# Altium PCB PCB.PcbDoc
Units mm, origin at the board's own origin, x right, y up, seen from the top; angles counter-clockwise.
Board outline 94 x 94 mm, 2 copper layers (Top Layer, Bottom Layer); 27 components, 14 nets, 75 pads, 30 vias.
Unrouted connection lines stored in the file: 38.
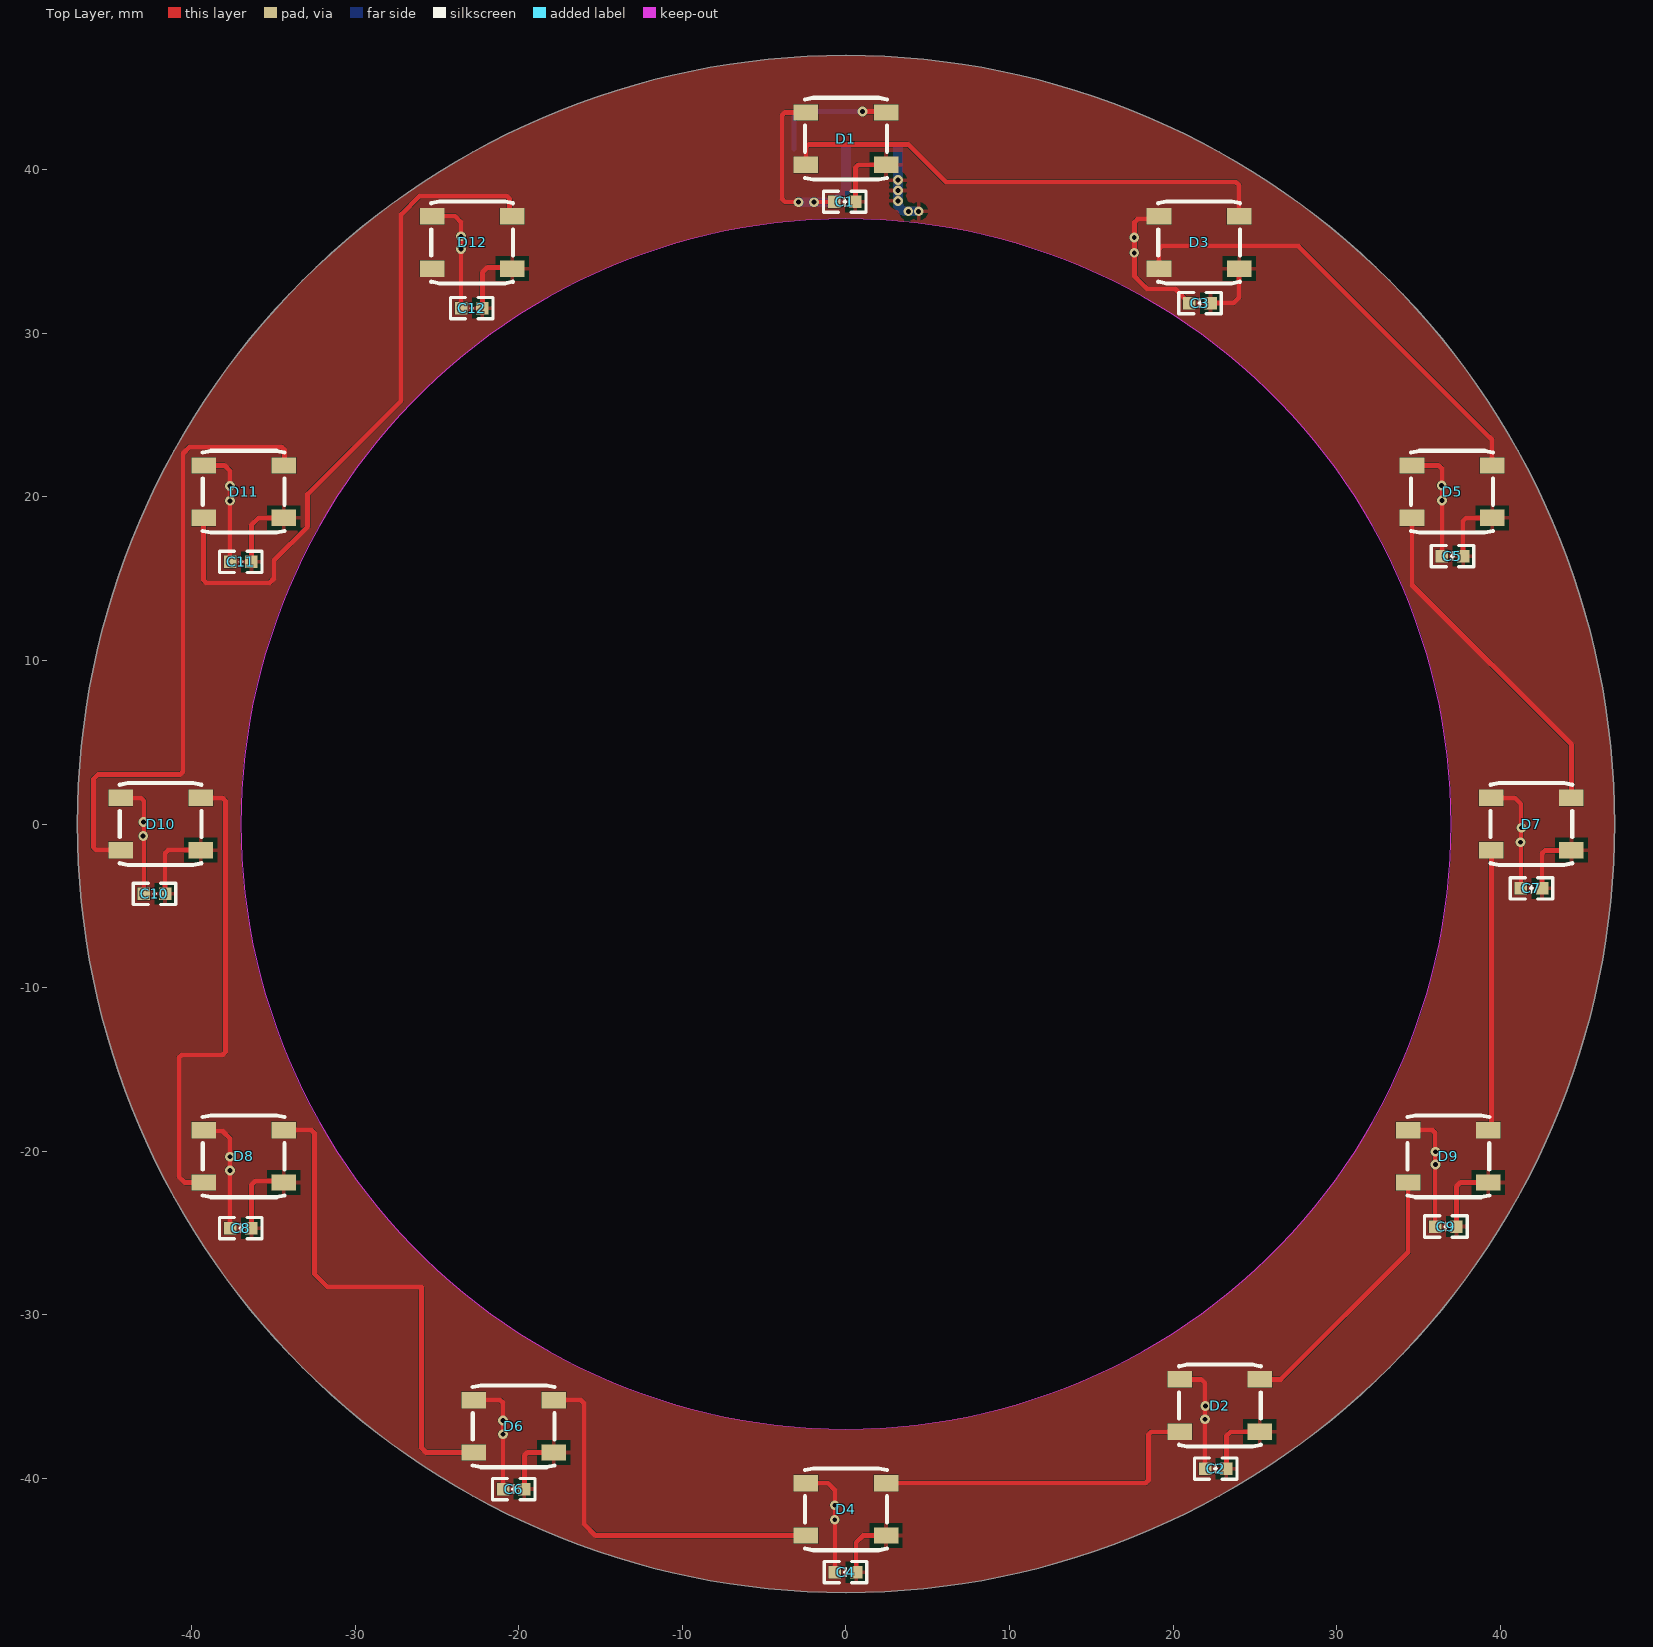
[diagram p0: Top Layer view]
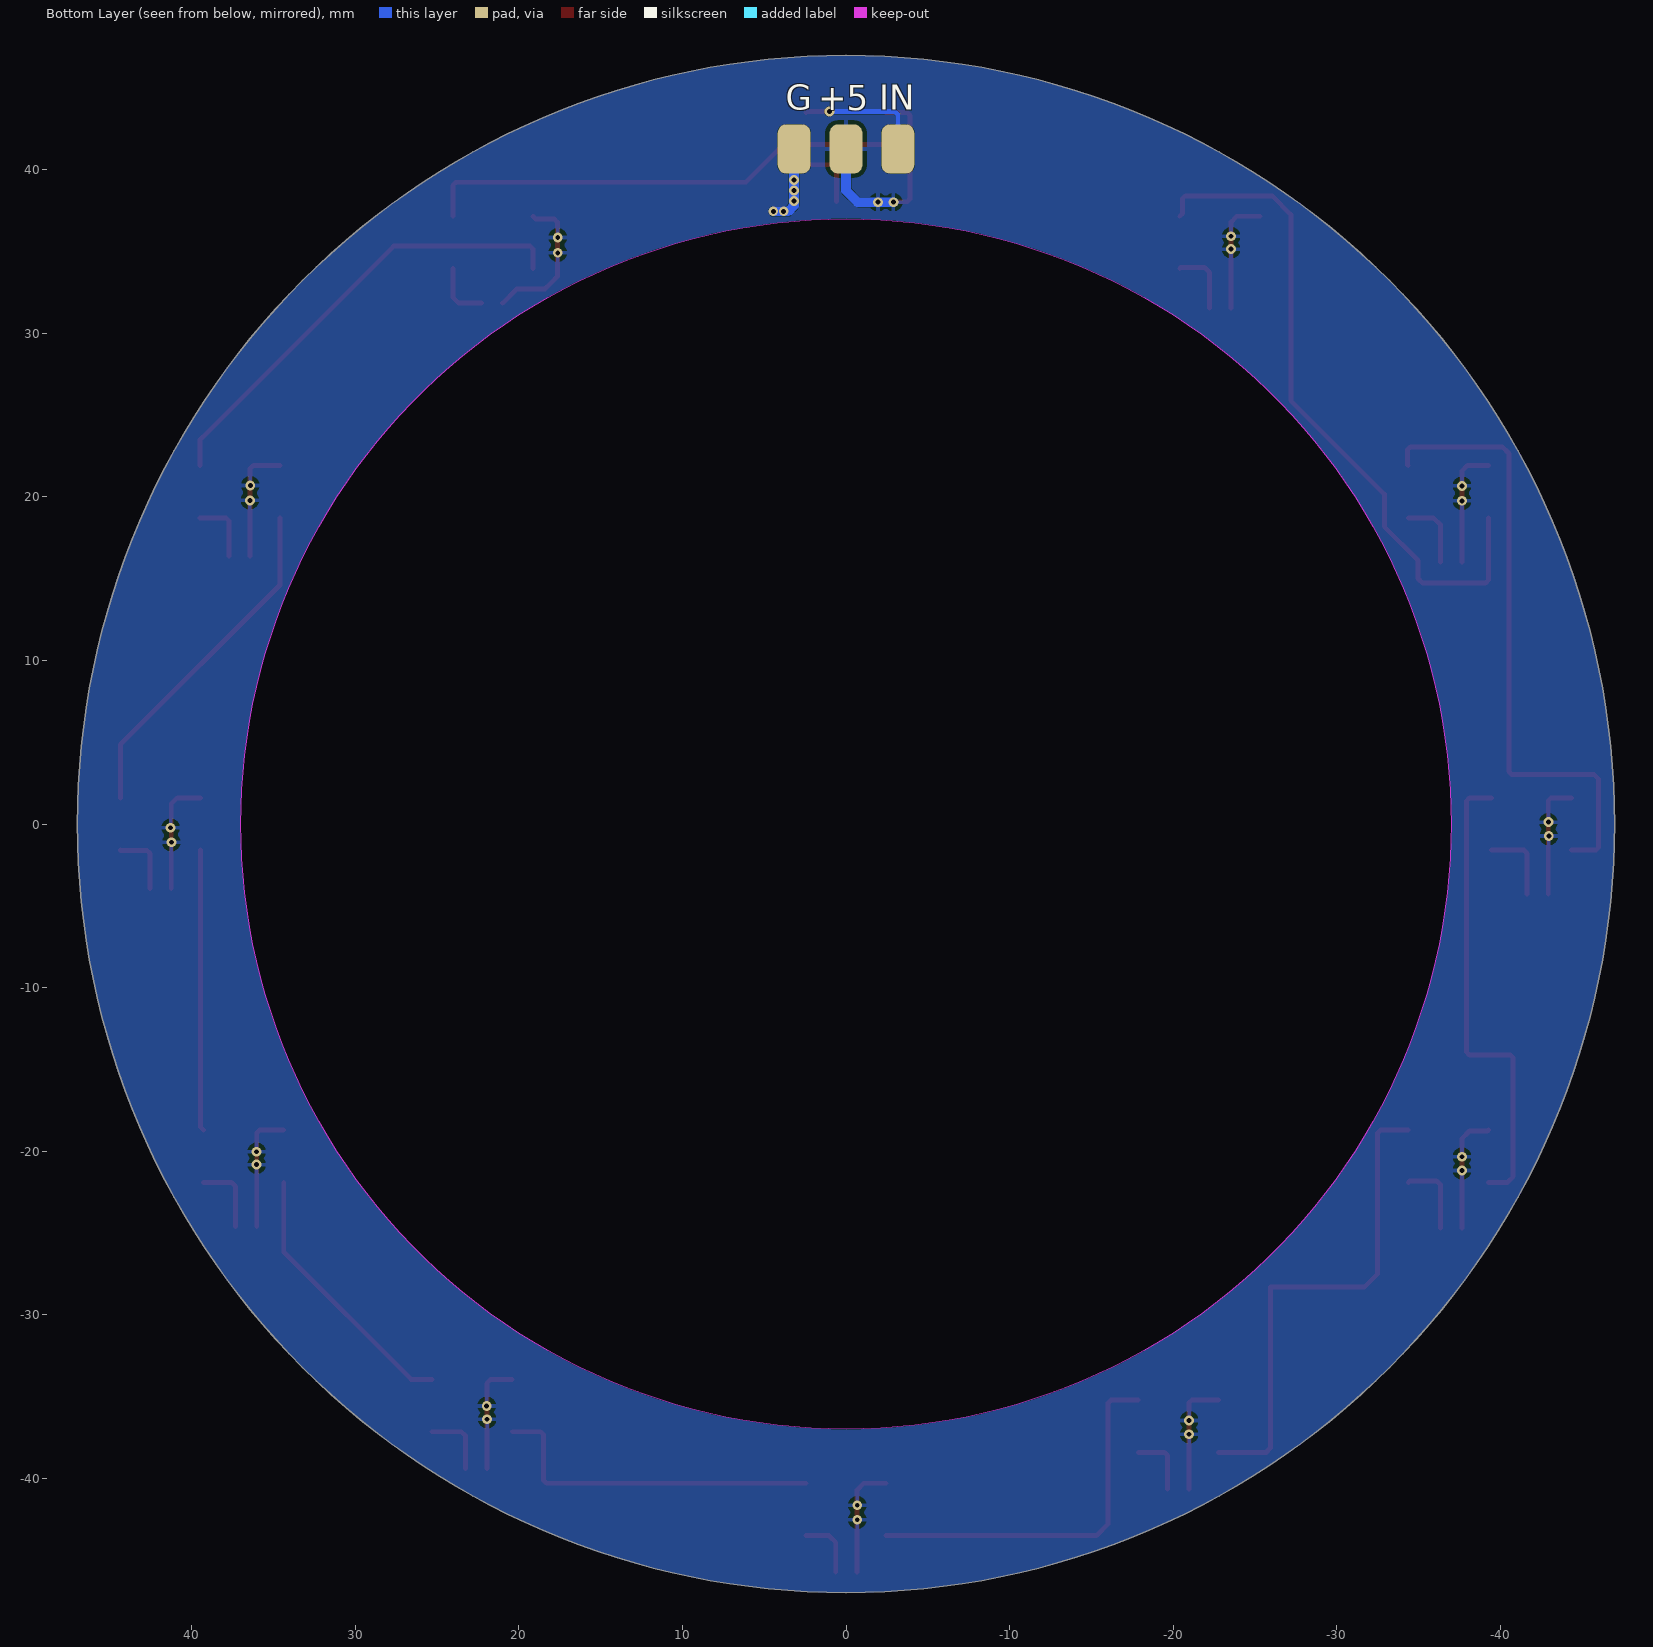
[diagram p1: Bottom Layer view, seen from below]
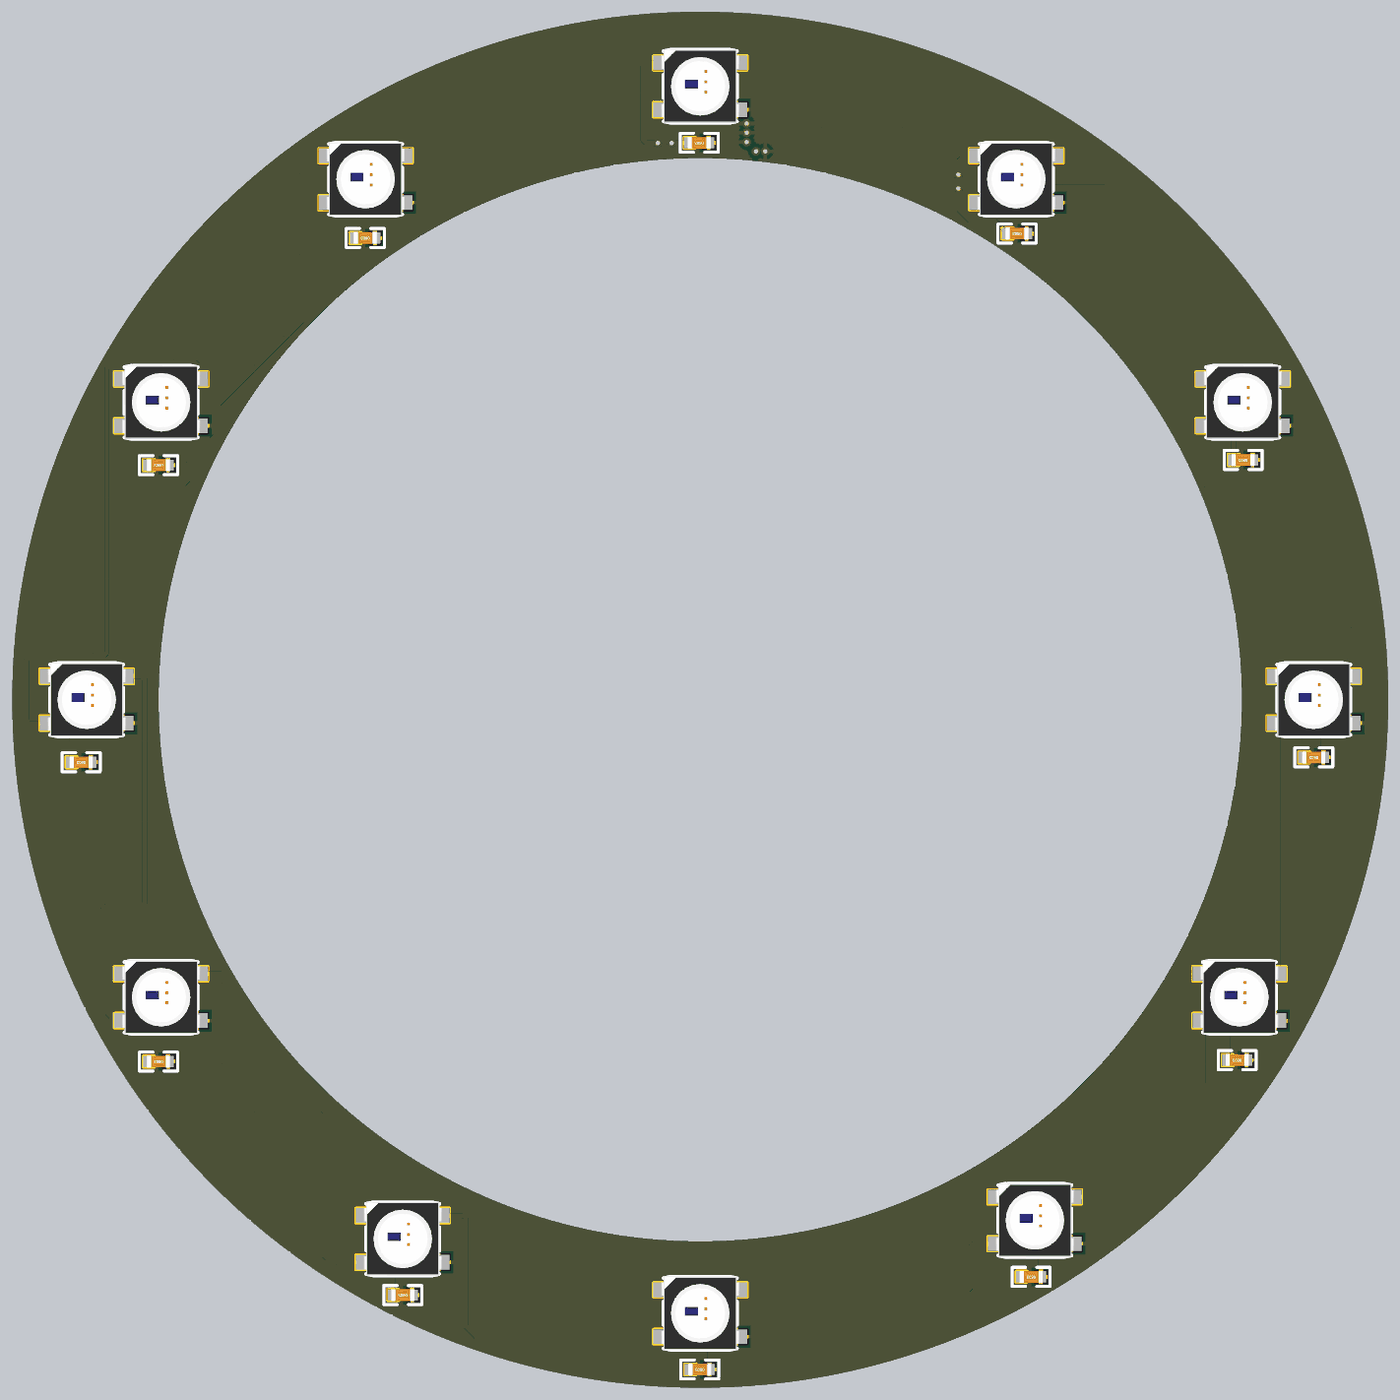
[diagram p2: 3D render of the assembled board from above, using the file's embedded part models]

## Layer stack, top to bottom
Top Solder: solder mask 0.0102, Solder Resist, Dk 3.5
Top Layer: signal copper 0.0356
Dielectric 1: dielectric 0.32, FR-4, Dk 4.8
Bottom Layer: signal copper 0.0356
Bottom Solder: solder mask 0.0102, Solder Resist, Dk 3.5

## Board outline
-47,0 ccw(c0,0) 0,-47 ccw(c0,0) 47,0 ccw(c0,0) 0,47 ccw(c0,0)
cut-out: -37,0 ccw(c0,0) 0,-37 ccw(c0,0) 37,0 ccw(c0,0) 0,37 ccw(c0,0)

## Design rules (kind name [scope] priority, off if disabled: settings)
Clearance [All] p1: gap=0.005 ignorepadtopadclearanceinfootprint=FALSE
HoleToHoleClearance [All] p1 off: gap=0.254 allowstackedmicrovias=TRUE
LayerPairs [All] p1 off: enforce=TRUE
MinimumSolderMaskSliver [All] p1 off: minsoldermaskwidth=0.254
NetAntennae [All] p1 off: netantennaetolerance=0
PolygonConnect [All] p1: connectstyle=Relief reliefconductorwidth=0.254 reliefentries=4 polygonreliefangle="90 Angle" airgapwidth=0.254
RoutingVias [All] p1: holewidth=0.711 width=1.27 viastyle="Through Hole" minholewidth=0.3 minwidth=0.6 maxholewidth=0.711 maxwidth=1.27
SilkToSilkClearance [All] p1 off: silktosilkclearance=0.254
SilkToSolderMaskClearance [IsPad] p1 off: minsilkscreentomaskgap=0.254 clearancetoexposedcopper=TRUE
SolderMaskExpansion [All] p1: expansion=0.102 istentingtop=FALSE
Width [All] p1: maxlimit=1 minlimit=0.3 preferedwidth=0.6 minimp=50.000000 maximp=50.000000 favimp=50.000000
24 further rules are at their usual default settings.

## Components (designator, comment, footprint, x,y, rotation, side; value= is the part's Value field where it differs from the comment)
+5 "PAD" PAD 0,41.275 r180 bottom (schematic designator P1)
C1 "cap" 0603c -0.076,38.049 r180 top
C2 "cap" 0603c 22.606,-39.421 r180 top
C3 "cap" 0603c 21.641,31.852 r180 top
C4 "cap" 0603c -0.025,-45.745 r180 top
C5 "cap" 0603c 37.084,16.383 r180 top
C6 "cap" 0603c -20.32,-40.665 r180 top
C7 "cap" 0603c 41.91,-3.937 r180 top
C8 "cap" 0603c -37.008,-24.714 r180 top
C9 "cap" 0603c 36.678,-24.613 r180 top
C10 "cap" 0603c -42.291,-4.267 r180 top
C11 "cap" 0603c -37.008,16.027 r180 top
C12 "cap" 0603c -22.885,31.547 r180 top
D1 "WS2812" WS2812 0,41.91 r0 top
D2 "WS2812" WS2812 22.86,-35.56 r0 top
D3 "WS2812" WS2812 21.59,35.56 r0 top
D4 "WS2812" WS2812 0,-41.91 r0 top
D5 "WS2812" WS2812 37.059,20.32 r0 top
D6 "WS2812" WS2812 -20.32,-36.83 r0 top
D7 "WS2812" WS2812 41.91,0 r0 top
D8 "WS2812" WS2812 -36.83,-20.32 r0 top
D9 "WS2812" WS2812 36.83,-20.32 r0 top
D10 "WS2812" WS2812 -41.91,0 r0 top
D11 "WS2812" WS2812 -36.83,20.32 r0 top
D12 "WS2812" WS2812 -22.86,35.56 r0 top
G "PAD" PAD 3.175,41.275 r180 bottom (schematic designator P2)
IN "PAD" PAD -3.175,41.275 r180 bottom (schematic designator P3)

## Footprints (in the part's own frame and the unit in brackets; to place one, negate y for a bottom-side part, rotate by r counter-clockwise, add the part's x,y. Pads: shape width x height; smd on the part's side, far side on the other; paste and mask are expansions set on the pad)
0603c [mil]
  rect 30x30 smd: 1(-25.65,0.05) 2(25.53,0.05)
  silkscreen extent -51,-26 51,26, body extent -32,-16 31,16, height 32
PAD [mm]
  rrect50% 2x3 smd: 1(0,0)
WS2812 [mm]
  rect 1.5x1 smd: 1(-2.45,1.6) 2(-2.45,-1.6) 3(2.45,-1.6) 4(2.45,1.6)
  silkscreen extent -2.5,-2.5 2.5,2.5, body extent -2.7,-2.5 2.7,2.5, height 1.54

## Part data
C1 C2 C3 C4 C5 C6 C7 C8 C9 C10 C11 C12: library part CAP

## Via types
v1: diameter 0.6, hole 0.3, Top Layer to Bottom Layer, tented both sides, 30 vias

## Nets (pads, with @x,y where several pads share a name; then routed paths per layer and width w, separated by ;. In a path a pad name is that pad's centre, name@x,y a point inside that pad or via, vN(x,y) a via of type N, cw(c..) or ccw(c..) an arc to the next point about the centre after c; other vN are vias at no path point)
+5: +5.1 C1.2 C2.2 C3.2 C4.2 C5.2 C6.2 C7.2 C8.2 C9.2 C10.2 C11.2 C12.2 D1.1 D2.1 D3.1 D4.1 D5.1 D6.1 D7.1 D8.1 D9.1 D10.1 D11.1 D12.1 | length 95.5
  Top Layer w0.3: D10.1 -43.115,1.6 -42.94,1.424 C10.2 ; D8.1 -39.229,-18.771 -38.125,-18.771 -37.656,-19.24 C8.2 ; D11.1 -37.998,21.92 -37.656,21.578 C11.2 ; D12.1 -23.901,37.16 -23.546,36.805 -23.546,31.557 C12.2 ; D6.1 -21.144,-35.23 -20.969,-35.406 C6.2 ; v1@-2.896,38.048 -3.736,38.048 -3.912,38.224 -3.912,43.334 -3.736,43.51 D1.1 ; D4.1 -1.092,-40.31 -0.674,-40.728 C4.2 ; v1@-1.956,38.048 C1.2 ; D3.1 18.962,36.982 17.829,36.982 17.653,36.807 17.653,33.477 18.034,33.096 18.415,32.715 20.127,32.715 C3.2 ; D2.1 21.716,-33.96 21.957,-34.202 C2.2 ; D9.1 35.853,-18.72 36.029,-18.896 C9.2 ; D5.1 36.246,21.92 36.435,21.731 C5.2 ; D7.1 40.894,1.6 41.261,1.233 C7.2
  Bottom Layer w0.6: v1(-2.896,38.024) v1(-1.956,38.024) -0.711,38.024 0,38.735 +5.1
  other v1: -0.686,-42.545 -0.686,-41.656 -20.98,-37.313 -20.98,-36.474 21.946,-36.398 21.971,-35.585 -37.668,-21.184 36.043,-20.828 -37.668,-20.345 36.043,-20.041 41.25,-1.118 -42.977,-0.737 41.3,-0.229 -42.952,0.116 -37.668,19.761 36.449,19.787 -37.668,20.676 36.424,20.701 17.628,34.925 -23.546,35.154 17.628,35.865 -23.546,35.941
GND: C1.1 C2.1 C3.1 C4.1 C5.1 C6.1 C7.1 C8.1 C9.1 C10.1 C11.1 C12.1 D1.3 D2.3 D3.3 D4.3 D5.3 D6.3 D7.3 D8.3 D9.3 D10.3 D11.3 D12.3 G.1 | length 55.1
  Top Layer w0.3: C10.1 -41.64,-1.787 -41.453,-1.6 D10.3 ; C8.1 -36.356,-22.072 -36.105,-21.821 -34.479,-21.821 D8.3 ; C11.1 -36.356,18.281 -35.918,18.72 D11.3 ; C12.1 -22.234,33.722 -21.92,34.036 -20.486,34.036 D12.3 ; C6.1 -19.669,-38.617 -19.482,-38.43 D6.3 ; C1.1 0.575,40.134 0.751,40.31 D1.3@2.45,40.31 ; C4.1 0.626,-43.926 1.042,-43.51 D4.3 ; C3.1 23.671,31.85 24.04,32.219 D3.3 ; C2.1 23.257,-37.423 23.521,-37.16 D2.3 ; C9.1 37.329,-22.158 37.567,-21.92 D9.3 ; C5.1 37.735,18.533 37.922,18.72 D5.3 ; C7.1 42.561,-1.801 42.737,-1.626 44.334,-1.626 D7.3
  Bottom Layer w0.6: G.1 v1(3.175,39.37) v1(3.175,38.735) v1(3.175,38.1) 3.175,37.816 3.526,37.465 v1(4.445,37.465)
  other v1: 3.81,37.465
IN: D1.4 IN.1 | length 7.8
  Top Layer w0.3: v1(1.016,43.561) 2.399,43.561 D1.4
  Bottom Layer w0.3: IN.1 -3.175,43.385 -2.999,43.561 v1(1.016,43.561)
NetD1_2: D1.2 D3.4 | length 30.6
  Top Layer w0.3: D1.2 -2.45,41.379 -2.274,41.554 3.81,41.554 6.121,39.243 23.851,39.243 24.04,39.054 D3.4
NetD2_2: D2.2 D4.4 | length 20.9
  Top Layer w0.3: D4.4 18.315,-40.31 18.491,-40.134 18.491,-37.336 18.667,-37.16 D2.2
NetD2_4: D2.4 D9.2 | length 16.5
  Top Layer w0.3: D2.4 26.594,-33.96 34.38,-26.174 D9.2
NetD3_2: D3.2 D5.4 | length 28.1
  Top Layer w0.3: D3.2 19.14,35.156 19.316,35.331 27.661,35.331 39.065,23.927 39.509,23.483 D5.4
NetD4_2: D4.2 D6.4 | length 23.2
  Top Layer w0.3: D6.4 -16.203,-35.23 -16.027,-35.406 -16.027,-42.799 -15.316,-43.51 D4.2
NetD5_2: D5.2 D7.4 | length 21.2
  Top Layer w0.3: D5.2 34.609,14.617 44.36,4.865 D7.4
NetD6_2: D6.2 D8.4 | length 30.6
  Top Layer w0.3: D8.4 -32.688,-18.72 -32.512,-18.896 -32.512,-27.508 -31.699,-28.321 -25.959,-28.321 -25.959,-38.151 -25.68,-38.43 D6.2
NetD7_2: D7.2 D9.4 | length 17.2
  Top Layer w0.3: D9.4 39.46,-18.54 D7.2
NetD8_2: D8.2 D10.4 | length 28.9
  Top Layer w0.3: D10.4 -38.123,1.6 -37.948,1.424 -37.948,-13.947 -38.123,-14.122 -40.617,-14.122 -40.792,-14.298 -40.792,-21.565 -40.437,-21.92 D8.2
NetD10_2: D10.2 D11.4 | length 38.5
  Top Layer w0.3: D10.2 -45.849,-1.6 -46.025,-1.424 -46.025,2.743 -45.745,3.023 -40.714,3.023 -40.538,3.198 -40.538,22.657 -40.132,23.063 -34.517,23.063 -34.341,22.887 -34.341,21.959 D11.4
NetD11_2: D11.2 D12.4 | length 42.1
  Top Layer w0.3: D11.2 -39.28,14.908 -39.104,14.732 -35.255,14.732 -34.976,15.011 -34.976,16.129 -32.918,18.186 -32.918,20.168 -27.203,25.883 -27.203,37.262 -26.06,38.405 -20.75,38.405 -20.574,38.229 -20.574,37.324 D12.4
pads on no net: D12.2

## Polygon pours and split planes (outlines as drawn)
GND on Top Layer "Top Layer-No Net" (solid, pour order 0): -47,0 ccw(c0,0) 0,-47 ccw(c0,0) 47,0 ccw(c0,0) 0,47 ccw(c0,0)
+5 on Bottom Layer "Top Layer-No Net1" (solid, pour order 1): -47,0 ccw(c0,0) 0,-47 ccw(c0,0) 47,0 ccw(c0,0) 0,47 ccw(c0,0)

## Silkscreen, mask and mechanical layers (free items; w line width, h text height)
Mechanical 1:
  circle w0.013: c0,0 r37
  circle w0.013: c0,0 r47